# EAGLE board ModuleThermistorVoltageSenseBoard (EAGLE 9.6.2)
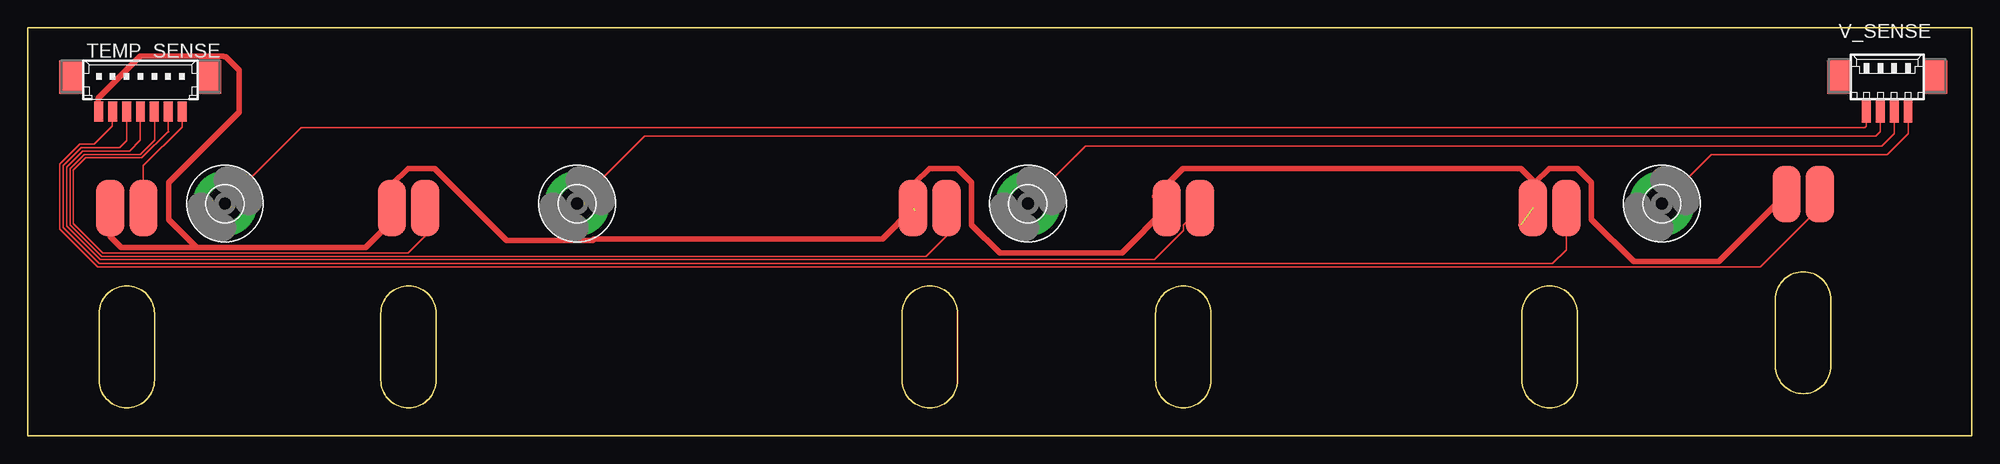
[diagram p0: board, top side]

Size 175.26 x 36.83 mm. Coordinates in mm from the lower left corner, seen from the top.
Outline: 0,0 175.26,0 175.26,36.83 0,36.83 0,0
Copper layers (1*16): Top 0.035mm / dielectric 1.5mm / Bottom 0.035mm
Design rules "default": minimum track width 6mil, minimum drill 0.35mm, track to track 6mil, track to pad 6mil, pad to pad 6mil, via to via 6mil, smd to smd 6mil, copper to edge 40mil, drill to drill 6mil, minimum pad ring 10mil, minimum via ring 8mil, stop-mask expansion 4mil, vias tented up to drill 0mil, thermal gap 10mil

## Footprints (pad centres in the part's own frame; a part is rotated, then mirrored left to right if it is on the bottom)
THERMISTOR_CUTOUT = smd 5.08 x 2.54: 1 18,4; 2 18,1
53398-07 = smd 0.8 x 1.8: 1 3.75,-2.5; 2 2.5,-2.5; 3 1.25,-2.5; 4 0,-2.5; 5 -1.25,-2.5; 6 -2.5,-2.5; 7 -3.75,-2.5 | smd 2.1 x 3: S1 6.25,0.625; S2 -6.25,0.625
3,2-PAD = drill 3.2 pad 5.842: B3,2 0,0
53261-04 = smd 0.8 x 2: 1 1.875,-2.5; 2 0.625,-2.5; 3 -0.625,-2.5; 4 -1.875,-2.5 | smd 2.1 x 3: S1 4.375,0.625; S2 -4.375,0.625

## Placement (x,y rotation side)
T1  [THERMISTOR_CUTOUT]  11.43,2.54 90 top
T2  [THERMISTOR_CUTOUT]  36.83,2.54 90 top
T3  [THERMISTOR_CUTOUT]  83.82,2.54 90 top
T4  [THERMISTOR_CUTOUT]  106.68,2.54 90 top
T5  [THERMISTOR_CUTOUT]  139.7,2.54 90 top
T6  [THERMISTOR_CUTOUT]  162.56,3.81 90 top
TEMP_SENSE  53398-07  [53398-07]  10.16,31.75 0 top
V1+  MOUNT-PAD-ROUND3.2  [3,2-PAD]  90.17,20.95 0 top
V1-  MOUNT-PAD-ROUND3.2  [3,2-PAD]  147.32,20.95 0 top
V2+  MOUNT-PAD-ROUND3.2  [3,2-PAD]  49.53,20.95 0 top
V3+  MOUNT-PAD-ROUND3.2  [3,2-PAD]  17.78,20.95 0 top
V_SENSE  53261-04  [53261-04]  167.64,31.75 0 top

## Library data of the parts
T1-T6 = Thermistor
TEMP_SENSE = con-molex; MF: MOLEX; OC_FARNELL: 9786368; OC_NEWARK: unknown
V1+ V1- V2+ V3+ = holes
V_SENSE = con-molex; MF: MOLEX; OC_FARNELL: 1125374; OC_NEWARK: unknown

## Nets
GND: T1.1 T2.1 T3.1 T4.1 T5.1 T6.1 TEMP_SENSE.7
N$3: T2.2 TEMP_SENSE.2
N$4: T3.2 TEMP_SENSE.3
N$5: T4.2 TEMP_SENSE.4
N$6: T5.2 TEMP_SENSE.5
N$7: T6.2 TEMP_SENSE.6
TSENSE1: T1.2 TEMP_SENSE.1
V1+: V1+.B3,2 V_SENSE.2
V1-: V1-.B3,2 V_SENSE.1
V2+: V2+.B3,2 V_SENSE.3
V3+: V3+.B3,2 V_SENSE.4

## Tracks (layer width: path | path; a pad name or v marks a point on that pad's centre or on a via)
GND  (2 unrouted)
  Top 0.508: T6.1 152.47,15.72 144.78,15.72 140.97,19.53 140.97,22.86 139.7,24.13 137.16,24.13 135.89,22.86 135.89,19.05 134.62,19.05 | T5.1 135.7,23.05 134.62,24.13 104.14,24.13 101.6,21.59 102.65,20.54 T4.1 98.65,16.51 87.63,16.51 85.09,19.05 85.09,22.86 83.82,24.13 81.28,24.13 80.01,22.86 80.01,20.32 | T3.1 77.06,17.78 51.06,17.78 50.91,17.63 43.18,17.63 36.68,24.13 34.29,24.13 32.83,22.67 T2.1 32.83,19.34 30.48,16.99 15.24,16.99 | 7.43,19.24 T1.1 7.43,17.97 8.41,16.99 15.24,16.99 | 15.24,16.99 12.7,19.53 12.7,22.86 19.05,29.21 19.05,33.02 17.86,34.21 17.78,34.21 17.7,34.21 17.63,34.28 10.15,34.28 6.35,30.48 6.35,29.31 TEMP_SENSE.7
N$3
  Top 0.152: 12.66,27.47 TEMP_SENSE.2 | 12.7,27.43 12.66,27.47 | 12.66,27.47 10.29,25.09 5.21,25.09 4.12,24 4.12,19.18 6.78,16.51 34.29,16.51 35.83,18.05 T2.2
N$4
  Top 0.152: TEMP_SENSE.3 11.43,29.23 11.43,26.67 10.16,25.4 5.08,25.4 3.81,24.13 3.81,19.05 6.66,16.2 80.97,16.2 82.82,18.05 T3.2
N$5
  Top 0.152: T4.2 104.18,19.04 104.18,18.52 101.56,15.9 6.53,15.9 3.5,18.92 3.5,24.26 4.95,25.7 9.2,25.7 10.16,26.67 TEMP_SENSE.4
N$6
  Top 0.152: TEMP_SENSE.5 8.91,26.64 8.28,26.01 4.83,26.01 3.2,24.38 3.2,18.8 6.45,15.54 137.47,15.54 138.7,16.78 T5.2
N$7
  Top 0.152: TEMP_SENSE.6 7.62,29.21 7.62,27.94 5.99,26.31 4.7,26.31 2.9,24.51 2.9,18.67 6.33,15.24 156.21,15.24 161.56,20.59 T6.2
TSENSE1
  Top 0.152: 13.97,29.19 TEMP_SENSE.1 13.91,27.88 10.43,24.4 T1.2
  Top 0.203: T1.2 10.43,22.59
V1+
  Top 0.152: V_SENSE.2 168.26,27.3 167.13,26.16 95.38,26.16 V1+.B3,2
V1-
  Top 0.152: V_SENSE.1 169.51,27.27 167.64,25.4 151.76,25.4 V1-.B3,2
V2+
  Top 0.152: V_SENSE.3 167.01,27.44 166.62,27.05 55.63,27.05 V2+.B3,2
V3+
  Top 0.152: V_SENSE.4 165.76,27.97 165.61,27.81 24.64,27.81 V3+.B3,2